# EAGLE board encoder-board (EAGLE 7.6.0)
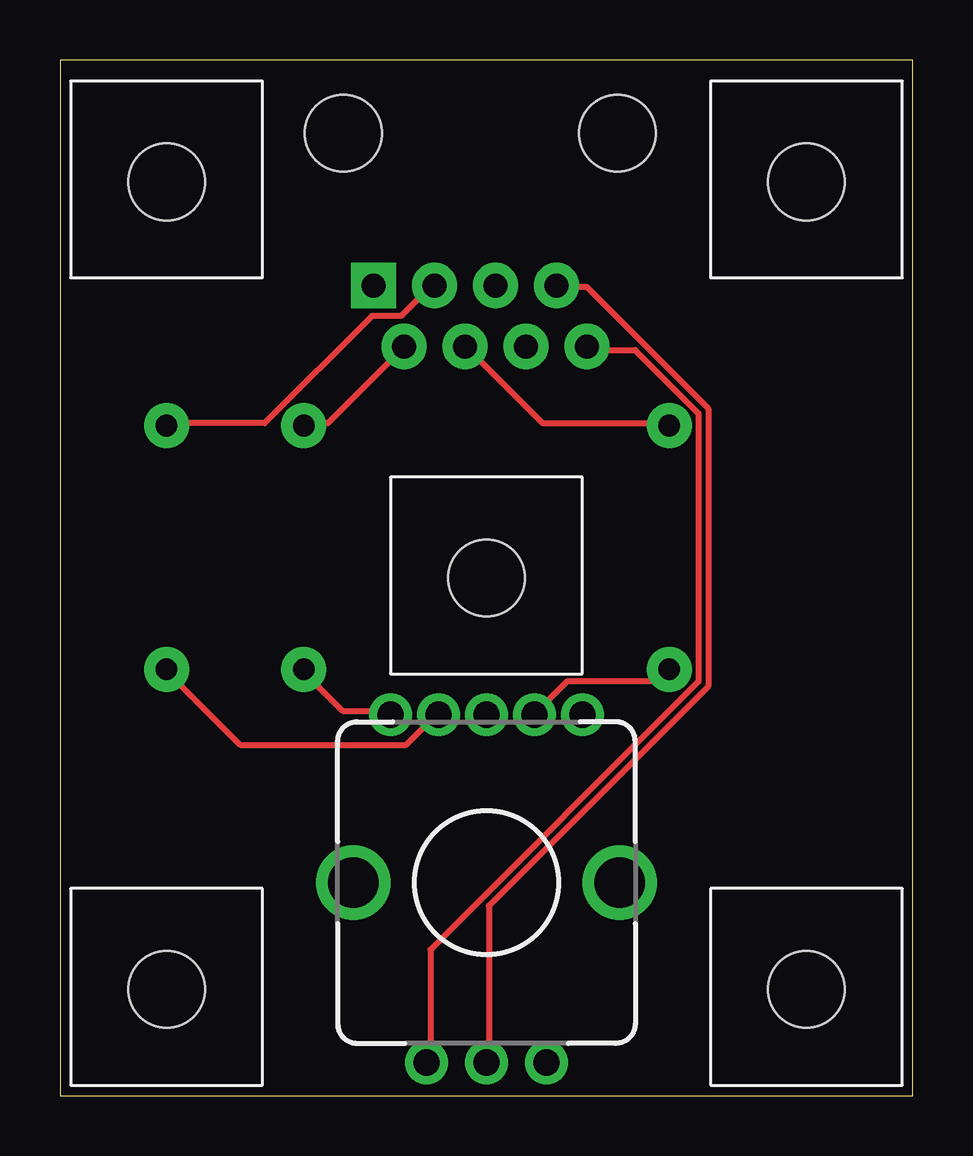
[diagram p0: board, top side]
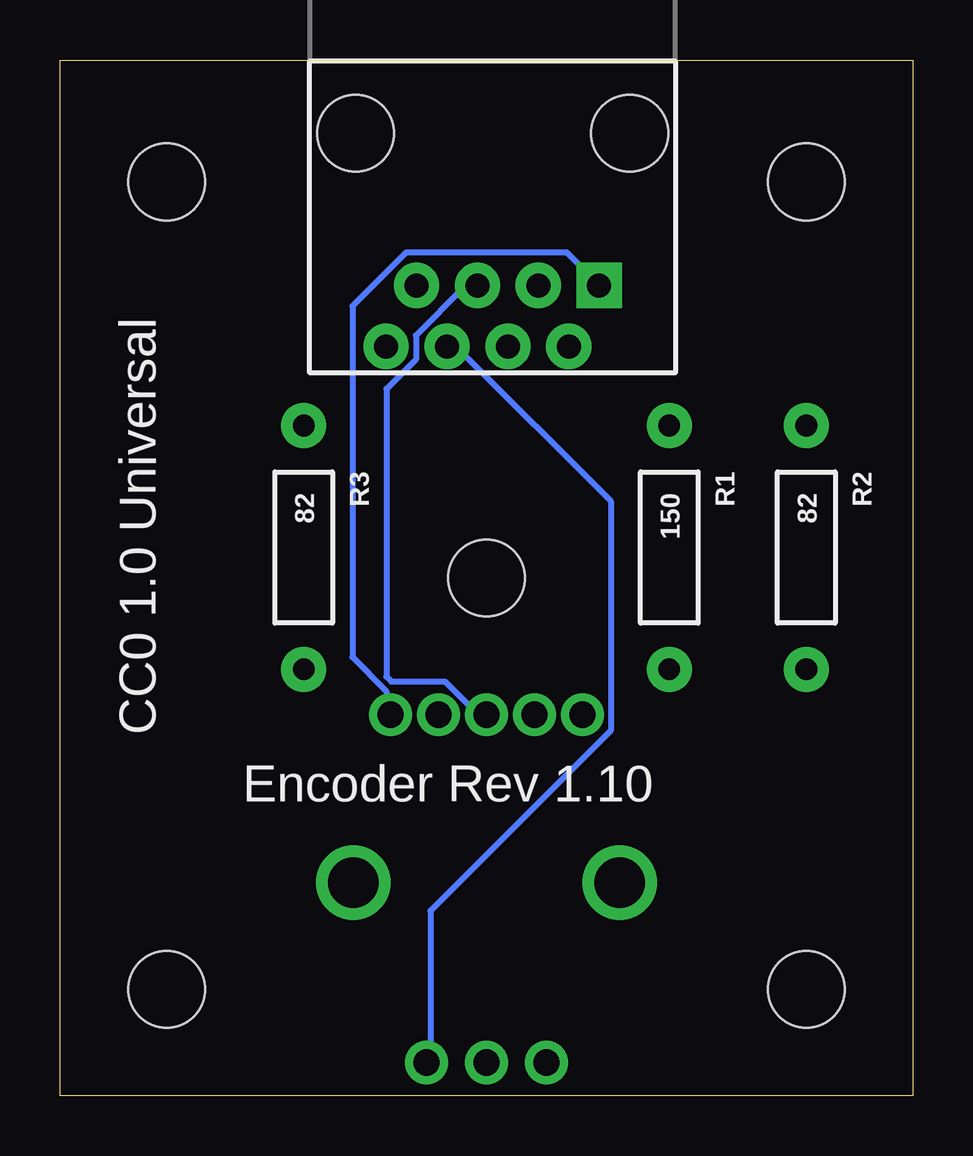
[diagram p1: board, bottom side, seen from below]

Size 35.56 x 43.18 mm. Coordinates in mm from the lower left corner, seen from the top.
Outline: 0,0 35.56,0 35.56,43.18 0,43.17 0,0
Copper layers (1*16): Top 0.0356mm / dielectric 1.5011mm / Bottom 0.0356mm
Design rules "LaenPCBOrder": minimum track width 6mil, minimum drill 13mil, track to track 6mil, track to pad 6mil, pad to pad 6mil, via to via 6mil, smd to smd 6mil, copper to edge 15mil, drill to drill 6mil, minimum pad ring 7mil, minimum via ring 7mil, stop-mask expansion 3mil, vias tented up to drill 0mil, thermal gap 10mil
Net classes: 0 default: width 0.254 mm; 1 power: width 0.381 mm

## Footprints (pad centres in the part's own frame; a part is rotated, then mirrored left to right if it is on the bottom)
RJ45-8 = drill 1 pad 1.88 square: 1 -4.445,6.35 | drill 1 pad 1.88: 2 -3.175,8.89; 3 -1.905,6.35; 4 -0.635,8.89; 5 0.635,6.35; 6 1.905,8.89; 7 3.175,6.35; 8 4.445,8.89 | hole 3.2: -5.715,0; 5.715,0
3.2-MOUNT = hole 3.2: 0,0
AXIAL-0.4 = drill 0.9 pad 1.88: P$1 -5.08,0; P$2 5.08,0
ENCODER_LED_3 = drill 1.1 pad 1.778: 1 -4,7; 2 -2,7; 3 0,7; 4 2,7; 5 4,7 | drill 1.1 pad 1.8: A -2.5,-7.5; B 2.5,-7.5; C 0,-7.5 | drill 2.1: M1 -5.55,0; M2 5.55,0

## Placement (x,y rotation side)
J1  RJ45-8PTH  [RJ45-8]  17.53,40.13 180 bottom
MT1  3.2-MOUNT  [3.2-MOUNT]  4.45,4.45 0 top
MT2  3.2-MOUNT  [3.2-MOUNT]  31.11,4.45 0 top
MT3  3.2-MOUNT  [3.2-MOUNT]  4.45,38.1 0 top
MT4  3.2-MOUNT  [3.2-MOUNT]  31.11,38.1 0 top
MT5  3.2-MOUNT  [3.2-MOUNT]  17.78,21.59 0 top
R1  150  [AXIAL-0.4]  10.16,22.86 270 bottom
R2  82  [AXIAL-0.4]  4.45,22.86 270 bottom
R3  82  [AXIAL-0.4]  25.4,22.86 270 bottom
SW2  SPARKFUN-COM-10982  [ENCODER_LED_3]  17.78,8.89 0 top

## Library data of the parts
J1 = SparkFun-Connectors
MT1-MT5 = PJS
R1-R3 = SparkFun-Resistors
SW2 = SparkFun-Electromechanical

## Nets
BLUE: J1.4 R3.P$1
GREEN: J1.3 R2.P$1
LED-SWITCH-COM: J1.1 SW2.5
N$1: R3.P$2 SW2.4
N$2: R1.P$2 SW2.1
N$3: R2.P$2 SW2.2
PUSHBUTTON: J1.5 SW2.3
QUAD-A: J1.8 SW2.A
QUAD-B: J1.6 SW2.B
QUAD-C: J1.7 SW2.C
RED: J1.2 R1.P$1

## Tracks (layer width: path | path; a pad name or v marks a point on that pad's centre or on a via)
BLUE
  Top 0.254: R3.P$1 25.4,28.04 20.12,28.04 17.07,31.09 J1.4
GREEN
  Top 0.254: R2.P$1 4.47,28.04 8.53,28.04 13.01,32.51 14.22,32.51 15.44,33.73 J1.3
LED-SWITCH-COM
  Bottom 0.254: SW2.5 21.95,16.05 21.95,16.87 23.37,18.29 23.37,32.92 21.13,35.15 14.43,35.15 13.21,33.93 J1.1
N$1
  Top 0.254: SW2.4 19.91,16.05 21.13,17.27 24.99,17.27 25.4,17.68 R3.P$2
N$2
  Top 0.254: SW2.1 13.61,16.05 11.79,16.05 10.16,17.68 R1.P$2
N$3
  Top 0.254: SW2.2 15.65,15.85 14.43,14.63 7.52,14.63 4.47,17.68 R2.P$2
PUSHBUTTON
  Bottom 0.254: SW2.3 17.88,16.05 18.29,16.05 19.51,17.27 21.74,17.27 21.95,17.48 21.95,29.46 20.73,30.68 20.73,31.7 18.69,33.73 18.29,33.73 J1.5
QUAD-A
  Top 0.254: SW2.A 15.44,1.42 15.44,6.1 26.62,17.27 26.62,28.45 23.98,31.09 22.15,31.09 J1.8
QUAD-B
  Bottom 0.254: SW2.B 20.12,1.42 20.12,7.72 12.6,15.24 12.6,24.79 18.9,31.09 19.3,31.09 J1.6
QUAD-C
  Top 0.254: SW2.C 17.88,1.42 17.88,7.92 27.03,17.07 27.03,28.65 21.95,33.73 20.73,33.73 J1.7
RED
  Top 0.254: R1.P$1 10.16,28.04 11.18,28.04 14.22,31.09 J1.2

## Text on the board
bNames: CC0 1.0 Universal | Encoder Rev 1.10